# EAGLE board Dinky (EAGLE 9.6.1)
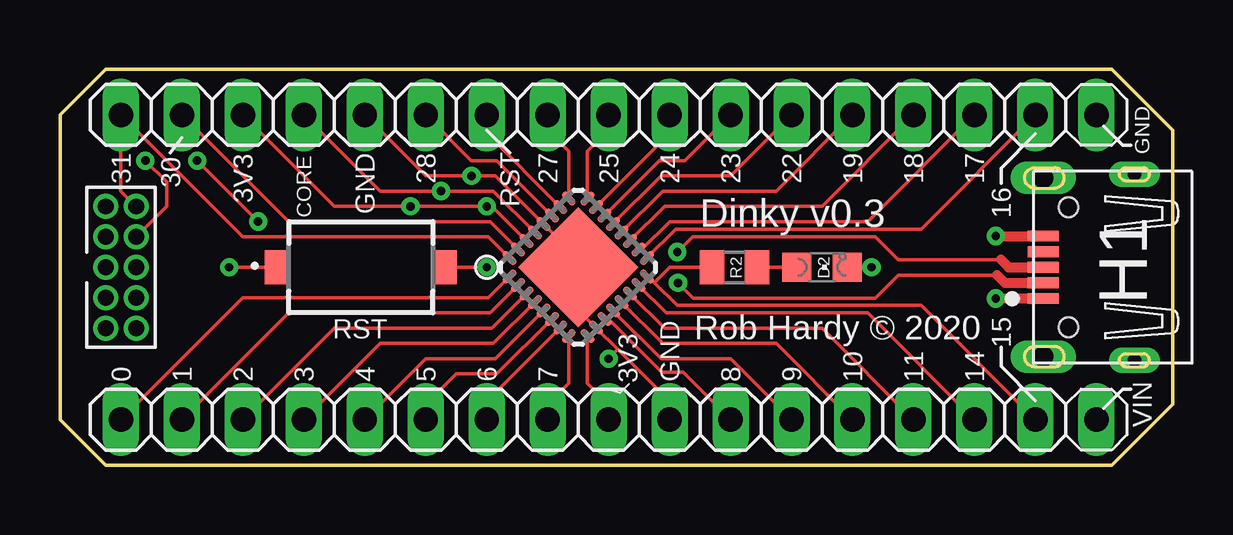
[diagram p0: board, top side]
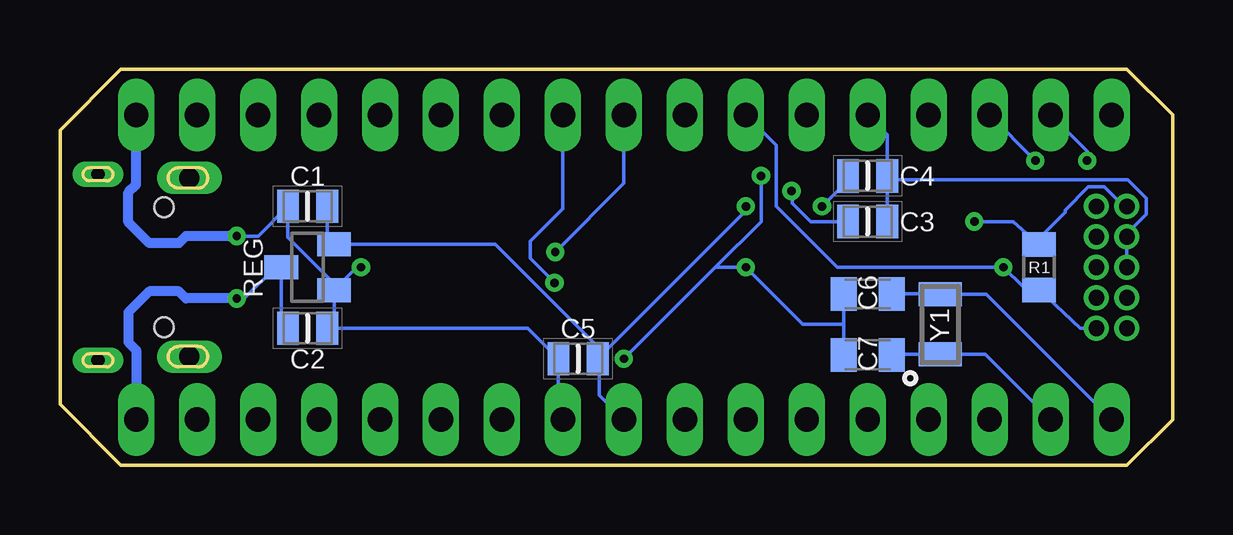
[diagram p1: board, bottom side, seen from below]

Size 46.35 x 16.51 mm. Coordinates in mm from the lower left corner, seen from the top.
Outline: 1.91,0 43.81,0 46.35,2.54 46.35,13.97 43.81,16.51 1.91,16.51 0,14.61 0,1.91 1.91,0
Copper layers (1*16): Top 0.035mm / dielectric 1.5mm / Bottom 0.035mm
Design rules "default": minimum track width 6mil, minimum drill 0.35mm, track to track 6mil, track to pad 6mil, pad to pad 6mil, via to via 6mil, smd to smd 6mil, copper to edge 40mil, drill to drill 6mil, minimum pad ring 10mil, minimum via ring 8mil, stop-mask expansion 4mil, vias tented up to drill 0mil, thermal gap 10mil

## Footprints (pad centres in the part's own frame; a part is rotated, then mirrored left to right if it is on the bottom)
CAPC2012X70N = smd 0.91 x 1.39: 1 -0.82,0; 2 0.82,0
C0805K = smd 1.1 x 1.4: 1 -1,0; 2 1,0
CHIPLED_0805 = smd 1.2 x 1.2: A 0,-1.05; C 0,1.05
1X16 = drill 1.016 long: 1 -19.05,0; 2 -16.51,0; 3 -13.97,0; 4 -11.43,0; 5 -8.89,0; 6 -6.35,0; 7 -3.81,0; 8 -1.27,0; 9 1.27,0; 10 3.81,0; 11 6.35,0; 12 8.89,0; 13 11.43,0; 14 13.97,0; 15 16.51,0; 16 19.05,0
1X1HEADER = drill 1.016 long: P$1 0,0
629105150521 = smd 0.45 x 1.3: 1 -1.3,3.8; 2 -0.65,3.8; 3 0,3.8; 4 0.65,3.8; 5 1.3,3.8 | drill 0.85 pad 1.2 long: Z1 -3.725,3.8; Z2 3.725,3.8 | drill 0.55 pad 0.9 long: Z3 3.875,0; Z4 -3.875,0 | hole 0.8: -2.5,2.75; 2.5,2.75
QFN32 = smd 0.7 x 0.3: 1 -2.3,1.75; 2 -2.3,1.25; 3 -2.3,0.75; 4 -2.3,0.25; 5 -2.3,-0.25; 6 -2.3,-0.75; 7 -2.3,-1.25; 8 -2.3,-1.75; 17 2.3,-1.75; 18 2.3,-1.25; 19 2.3,-0.75; 20 2.3,-0.25; 21 2.3,0.25; 22 2.3,0.75; 23 2.3,1.25; 24 2.3,1.75 | smd 0.3 x 0.7: 9 -1.75,-2.3; 10 -1.25,-2.3; 11 -0.75,-2.3; 12 -0.25,-2.3; 13 0.25,-2.3; 14 0.75,-2.3; 15 1.25,-2.3; 16 1.75,-2.3; 25 1.75,2.3; 26 1.25,2.3; 27 0.75,2.3; 28 0.25,2.3; 29 -0.25,2.3; 30 -0.75,2.3; 31 -1.25,2.3; 32 -1.75,2.3 | smd 3.53 x 3.53: EXP 0,0
R0805 = smd 1.02 x 1.4: 1 -0.94,0; 2 0.94,0
SOT23 = smd 1 x 1.4: 1 -0.95,-1.1; 2 0.95,-1.1; 3 0,1.1
KSR = smd 1 x 1.4: 1 -3.5,0; 2 3.5,0
CM7V-T1A = smd 1 x 1.8: 1 -1.25,0; 2 1.25,0

## Placement (x,y rotation side)
C1  [CAPC2012X70N]  36.04,10.79 180 bottom
C2  [CAPC2012X70N]  36.04,5.71 0 bottom
C3  [CAPC2012X70N]  12.7,10.16 0 bottom
C4  [CAPC2012X70N]  12.7,12.06 0 bottom
C5  [CAPC2012X70N]  24.77,4.45 0 bottom
C6  [C0805K]  12.7,7.14 0 bottom
C7  [C0805K]  12.7,4.6 0 bottom
D2  [CHIPLED_0805]  31.75,8.26 270 top
E$1  [1X16]  21.59,14.61 0 top
E$2  [1X16]  21.59,1.91 0 top
E$4  [1X1HEADER]  43.18,14.61 0 top
E$5  [1X1HEADER]  43.18,1.91 0 top
H1  [629105150521]  44.77,8.26 90 top
IC1  SAMD21  [QFN32]  21.59,8.26 45 top
R1  [R0805]  5.56,8.26 270 bottom
R2  [R0805]  28.1,8.26 0 top
REG  [SOT23]  36.04,8.26 90 bottom
RST  [KSR]  12.54,8.26 0 top
Y1  [CM7V-T1A]  9.68,5.87 90 bottom

## Library data of the parts
C1-C5 = GRM2165C1H471JA01J
C6 C7 D2 REG = adafruit
E$1 E$2 = pinhead
E$4 E$5 = 1x1Header
H1 = Wurth_Elektronik_Electromechanic_Input-Output_Connectors_rev16a
IC1 = cypress
R1 R2 = smd-ipc
RST = KSR221G_LFS
Y1 = CM7V-T1A-32.768kHz-12.5pF-20PP

## Nets
S$1: E$1.1 IC1.32
S$2: E$1.2 IC1.31
S$3: C1.1 C4.1 C5.2 E$1.3 E$2.9 IC1.9 IC1.30 R1.1 REG.2
S$4: C3.1 E$1.4 IC1.29
S$5: D2.A R2.2
S$6: E$1.6 IC1.27
S$7: E$1.7 IC1.26 R1.2 RST.1
S$8: E$1.8 IC1.25
S$9: E$1.9 H1.3 IC1.24
S$10: E$1.10 H1.2 IC1.23
S$11: E$1.11 IC1.22
S$12: E$1.12 IC1.21
S$13: E$1.13 IC1.20
S$14: E$1.14 IC1.19
S$15: E$1.15 IC1.18
S$16: E$1.16 IC1.17
S$17: E$2.16 IC1.16 R2.1
S$18: E$2.15 IC1.15
S$19: E$2.14 IC1.14
S$20: E$2.13 IC1.13
S$21: E$2.12 IC1.12
S$22: E$2.11 IC1.11
S$23: C1.2 C2.2 C3.2 C4.2 C5.1 C6.1 C7.1 D2.C E$1.5 E$2.10 E$4.P$1 H1.5 IC1.10 IC1.28 IC1.EXP REG.1 RST.2
S$24: C6.2 E$2.1 IC1.1 Y1.2
S$25: E$2.8 IC1.8
S$26: E$2.7 IC1.7
S$27: E$2.6 IC1.6
S$28: E$2.5 IC1.5
S$29: E$2.4 IC1.4
S$30: E$2.3 IC1.3
S$33: C2.1 E$5.P$1 H1.1 REG.3
S$34: C7.2 E$2.2 IC1.2 Y1.1

## Tracks (layer width: path | path; a pad name or v marks a point on that pad's centre or on a via)
S$1
  Top 0.152: IC1.32 17.84,9.53 7.62,9.53 E$1.1 2.54,11.43 3.17,10.79
S$2  (via drill 0.35)
  Top 0.152: IC1.31 17.92,10.16 9.53,10.16 E$1.2 | v3.56,12.7 4.45,11.81 4.45,10.79 3.17,9.53
  Bottom 0.152: E$1.2 3.56,13.08 v3.56,12.7
S$3  (via drill 0.35)
  Top 0.152: IC1.9 21.98,3.42 22.86,2.54 E$2.9 | IC1.30 17.99,10.79 v17.78,10.79 v14.61,10.79 11.43,10.79 E$1.3 | v8.26,10.16 v5.71,12.7
  Bottom 0.152: C1.1 35.22,9.48 REG.2 28.23,9.21 24.1,5.08 24.1,4.6 C5.2 | 1.91,10.79 2.03,10.79 2.84,11.6 3.51,11.6 4.47,10.64 4.47,10.54 5.56,9.46 R1.1 6.64,10.16 v8.26,10.16 | v5.71,12.7 E$1.3 | C4.1 13.52,11.88 v14.61,10.79 | E$2.9 23.88,2.92 23.88,4.38 C5.2 | C5.2 17.78,10.61 v17.78,10.79
S$4  (via drill 0.35)
  Top 0.152: IC1.29 18.06,11.43 v15.88,11.43 13.34,11.43 E$1.4
  Bottom 0.152: v15.88,11.43 15.85,11.4 15.85,10.92 15.08,10.16 C3.1
S$5
  Top 0.152: R2.2 D2.A
S$6
  Top 0.152: IC1.27 18.21,12.7 17.14,12.7 E$1.6
S$7  (via drill 0.35)
  Top 0.152: IC1.26 17.78,13.83 E$1.7 | RST.1 v7.05,8.26
  Bottom 0.152: 3.17,5.71 3.84,5.71 R1.2 6.23,7.43 v7.05,8.26 13.97,8.26 16.51,10.79 16.51,13.33 E$1.7
S$8
  Top 0.152: IC1.25 21.2,13.09 20.32,13.97 E$1.8
S$9  (via drill 0.35)
  Top 0.152: 39.21,8.57 34.92,8.57 33.97,9.53 26.35,9.53 v25.72,8.89 | IC1.24 21.98,13.09 22.86,13.97 E$1.9
  Top 0.406: 39.21,8.57 39.53,8.26 H1.3
  Bottom 0.152: v25.72,8.89 22.86,11.75 E$1.9
S$10  (via drill 0.35)
  Top 0.152: 39.05,7.92 34.92,7.92 33.97,6.97 26.38,6.97 v25.75,7.6 | IC1.23 25.4,13.83 E$1.10
  Top 0.406: 39.05,7.92 39.37,7.6 H1.2
  Bottom 0.152: v25.75,7.6 26.77,8.62 26.77,9.34 25.4,10.7 E$1.10
S$11
  Top 0.152: IC1.22 24.97,12.7 26.04,12.7 E$1.11
S$12
  Top 0.152: IC1.21 25.05,12.06 27.94,12.06 E$1.12
S$13
  Top 0.152: IC1.20 25.12,11.43 29.84,11.43 E$1.13
S$14
  Top 0.152: IC1.19 25.19,10.79 31.75,10.79 E$1.14
S$15
  Top 0.152: IC1.18 24.24,9 25.4,10.16 33.66,10.16 E$1.15
S$16
  Top 0.152: IC1.17 25.65,9.84 35.88,9.84 E$1.16
S$17
  Top 0.152: IC1.16 24.52,7.87 24.77,7.62 | 24.77,7.62 25.72,6.67 35.88,6.67 E$2.16 | 24.77,7.62 25.4,8.26 R2.1
S$18
  Top 0.152: IC1.15 25.26,6.35 33.66,6.35 E$2.15
S$19
  Top 0.152: IC1.14 25.19,5.71 31.75,5.71 E$2.14
S$20
  Top 0.152: IC1.13 25.12,5.08 29.84,5.08 E$2.13
S$21
  Top 0.152: IC1.12 25.05,4.45 27.94,4.45 E$2.12
S$22
  Top 0.152: IC1.11 22.86,6.1 25.07,3.89 25.96,3.89 E$2.11
S$23  (via drill 0.35)
  Top 0.152: 23.25,4.83 IC1.10 21.59,6.49 21.59,6.98 | 23.25,4.83 25.4,2.68 E$2.10 | E$1.5 15.24,12.06 v17.14,12.06 18.13,12.06 IC1.28 21.59,8.61 IC1.EXP | 23.25,4.83 v22.86,4.45 | v22.86,4.45 | v38.99,9.55 39.02,9.53 | RST.2 v17.78,8.26 | D2.C v33.81,8.26
  Top 0.406: v38.99,9.55 H1.5
  Bottom 0.152: v38.99,9.55 38.1,9.55 C1.2 36.86,9.5 34.94,7.58 REG.1 | REG.1 34.94,6 C2.2 26.86,5.71 C5.1 25.59,2.09 E$2.10 | 1.91,8.26 1.91,9.65 1.1,10.46 1.1,11.13 1.88,11.91 11.72,11.91 C4.2 | C4.2 11.88,13.79 E$1.5 | C3.2 C4.2 | v22.86,4.45 19.05,8.26 | 19.05,8.26 17.14,10.16 v17.14,12.06 | 19.05,8.26 v17.78,8.26 15.4,5.87 13.7,5.87 | v33.81,8.26 33.99,8.26 REG.1 | C7.1 13.7,5.87 | 13.7,5.87 C6.1
  Bottom 0.406: v38.99,9.55 41.11,9.55 41.4,9.26 42.64,9.26 43.51,10.14 43.51,11.37 43.18,11.7 E$4.P$1
S$24
  Top 0.152: IC1.1 17.84,6.98 7.62,6.98 E$2.1
  Bottom 0.152: E$2.1 7.76,7.12 Y1.2 9.7,7.14 C6.2
S$25
  Top 0.152: IC1.8 21.2,3.42 20.32,2.54 E$2.8
S$26
  Top 0.152: IC1.7 17.78,2.68 E$2.7
S$27
  Top 0.152: IC1.6 18.21,3.81 16.51,3.81 15.24,2.54 E$2.6
S$28
  Top 0.152: IC1.5 18.13,4.45 15.24,4.45 E$2.5
S$29
  Top 0.152: IC1.4 18.06,5.08 13.34,5.08 E$2.4
S$30
  Top 0.152: IC1.3 17.99,5.71 11.43,5.71 E$2.3
S$31  (via drill 0.65 pad 1.05)
  other vias: 3.17,10.79
S$32  (via drill 0.65 pad 1.05)
  other vias: 1.91,10.79
S$33  (via drill 0.35)
  Top 0.152: v38.99,6.96 v38.99,6.95
  Top 0.406: v38.99,6.96 H1.1
  Bottom 0.152: C2.1 37.14,6 REG.3 37.37,8.26 38.67,6.96 v38.99,6.96
  Bottom 0.406: v38.99,6.96 41.11,6.96 41.4,7.25 42.64,7.25 43.51,6.37 43.51,5.14 43.18,4.81 E$5.P$1
S$34
  Top 0.152: IC1.2 17.92,6.35 9.53,6.35 E$2.2
  Bottom 0.152: E$2.2 7.8,4.62 Y1.1 11.68,4.62 C7.2
S$35  (via drill 0.65 pad 1.05)
  other vias: 1.91,9.53
S$36  (via drill 0.65 pad 1.05)
  other vias: 3.17,9.53
S$37  (via drill 0.65 pad 1.05)
  other vias: 3.17,8.26
S$38  (via drill 0.65 pad 1.05)
  other vias: 1.91,8.26
S$39  (via drill 0.65 pad 1.05)
  other vias: 1.91,6.98
S$40  (via drill 0.65 pad 1.05)
  other vias: 3.17,6.98
S$41  (via drill 0.65 pad 1.05)
  other vias: 3.17,5.71
S$42  (via drill 0.65 pad 1.05)
  other vias: 1.91,5.71

## Text on the board
tNames: GND | 31 | 30 | 28 | 27 | 25 | 24 | 23 | 22 | 19 | 18 | 17 | 3V3 | CORE | GND | RST | 16 | Dinky v0.3 | Rob Hardy © 2020 | 15 | 3V3 | GND | 0 | 1 | 2 | 3 | 4 | 5 | 6 | 7 | 8 | 9 | 10 | 11 | 14 | VIN